# EAGLE board CT_schematic (EAGLE 7.6.0)

Size 100 x 80 mm. Coordinates in mm from the lower left corner, seen from the top.
Outline: 0,0 100,0 100,80 0,80 0,0
Copper layers (1*16): Top 0.035mm / dielectric 1.5mm / Bottom 0.035mm
Design rules "default": minimum track width 10mil, minimum drill 24mil, track to track 8mil, track to pad 8mil, pad to pad 8mil, via to via 8mil, smd to smd 8mil, copper to edge 40mil, drill to drill 8mil, minimum pad ring 10mil, minimum via ring 8mil, stop-mask expansion 4mil, vias tented up to drill 0mil, thermal gap 10mil

## Footprints (pad centres in the part's own frame; a part is rotated, then mirrored left to right if it is on the bottom)
C0603 = smd 0.8 x 0.8: 1 -0.762,0; 2 0.762,0
C0402 = smd 0.5 x 0.5: 1 -0.508,0; 2 0.508,0
EXV-9B = smd 2.718 x 1.778: 1 -2.108,0; 2 2.108,0
EXV-9H = smd 3.505 x 1.676: 1 -2.857,0; 2 2.857,0
L0603 = smd 0.8 x 0.8: 1 -0.762,0; 2 0.762,0
PJ-037B_PACKAGE = drill 3.7 square: 1 12,0 | drill 3.2 square: 2 6,0
R0603 = smd 0.8 x 0.8: 1 -0.762,0; 2 0.762,0
WLCSP64 = smd 0.34 x 0.34: A1 -1.75,1.75; A2 -1.25,1.75; A3 -0.75,1.75; A4 -0.25,1.75; A5 0.25,1.75; A6 0.75,1.75; A7 1.25,1.75; A8 1.75,1.75; B1 -1.75,1.25; B2 -1.25,1.25; B3 -0.75,1.25; B4 -0.25,1.25; B5 0.25,1.25; B6 0.75,1.25; B7 1.25,1.25; B8 1.75,1.25; C1 -1.75,0.75; C2 -1.25,0.75; C3 -0.75,0.75; C4 -0.25,0.75; C5 0.25,0.75; C6 0.75,0.75; C7 1.25,0.75; C8 1.75,0.75; D1 -1.75,0.25; D2 -1.25,0.25; D3 -0.75,0.25; D4 -0.25,0.25; D5 0.25,0.25; D6 0.75,0.25; D7 1.25,0.25; D8 1.75,0.25; E1 -1.75,-0.25; E2 -1.25,-0.25; E3 -0.75,-0.25; E4 -0.25,-0.25; E5 0.25,-0.25; E6 0.75,-0.25; E7 1.25,-0.25; E8 1.75,-0.25; F1 -1.75,-0.75; F2 -1.25,-0.75; F3 -0.75,-0.75; F4 -0.25,-0.75; F5 0.25,-0.75; F6 0.75,-0.75; F7 1.25,-0.75; F8 1.75,-0.75; G1 -1.75,-1.25; G2 -1.25,-1.25; G3 -0.75,-1.25; G4 -0.25,-1.25; G5 0.25,-1.25; G6 0.75,-1.25; G7 1.25,-1.25; G8 1.75,-1.25; H1 -1.75,-1.75; H2 -1.25,-1.75; H3 -0.75,-1.75; H4 -0.25,-1.75; H5 0.25,-1.75; H6 0.75,-1.75; H7 1.25,-1.75; H8 1.75,-1.75
TST-110-05-T-D-RA = drill 1 pad 1.7 square: 1 0,0 | drill 1 pad 1.7: 2 0,2.54; 3 2.54,0; 4 2.54,2.54; 5 5.08,0; 6 5.08,2.54; 7 7.62,0; 8 7.62,2.54; 9 10.16,0; 10 10.16,2.54; 11 12.7,0; 12 12.7,2.54; 13 15.24,0; 14 15.24,2.54; 15 17.78,0; 16 17.78,2.54; 17 20.32,0; 18 20.32,2.54; 19 22.86,0; 20 22.86,2.54
TDFN-8/6MM = smd 0.3 x 0.75: 1 0,0; 2 0.5,0; 3 1,0; 4 1.5,0; 5 1.5,3; 6 1,3; 7 0.5,3; 8 0,3
USB-A-H = drill 0.914: 1 2.718,3.493; 2 2.718,1.003; 3 2.718,-1.003; 4 2.718,-3.493 | drill 2.311: 5 0,-6.566; 6 0,6.566
SOT143B = smd 1 x 0.7: 1 -0.75,-1 | smd 0.6 x 0.7: 2 0.95,-1; 3 0.95,1; 4 -0.95,1
ABLS-25.000MHZ-B2F-T = smd 5.6 x 2.8: 1 -3.81,0; 2 5.69,0
ASEK = smd 1.4 x 1: 1 -1.1,-0.8; 2 1.1,-0.8; 3 1.1,0.8; 4 -1.1,0.8
LP2954 = smd 1.6 x 0.6: 1 -2.475,1.905 | smd 1.55 x 0.6: 2 -2.475,0.635; 3 -2.475,-0.635; 4 -2.475,-1.905; 5 2.475,-1.905; 6 2.475,-0.635; 7 2.475,0.635; 8 2.475,1.905
SON-6 = smd 0.55 x 0.3: 1 -0.355,0.5 | smd 0.52 x 0.3: 2 -0.37,0; 3 -0.37,-0.5; 4 0.37,-0.5; 5 0.37,0; 6 0.37,0.5
SW_4-1437565-2 = smd 1.4 x 2.1: 1 -2.23,4.55; 2 -2.23,-4.55; 3 2.23,4.55; 4 2.23,-4.55
LGM67K-G1J2-24-Z = smd 0.8 x 1.4: A -2,0; C 0,0
NC7SZ125M5X = smd 1.3 x 0.7: 1 -1.3,0.95; 2 -1.3,0; 3 -1.3,-0.95; 4 1.3,-0.95; 5 1.3,0.95

## Placement (x,y rotation side)
C1  1e-07  [C0603]  -33.02,59.69 0 top  (outside the outline)
C2  1e-07  [C0603]  -36.83,59.69 0 top  (outside the outline)
C3  1e-07  [C0603]  -40.64,59.69 0 top  (outside the outline)
C4  1e-07  [C0603]  -44.45,59.69 0 top  (outside the outline)
C5  4.7e-06  [C0603]  -29.21,59.69 0 top  (outside the outline)
C6  1e-07  [C0603]  -48.26,59.69 0 top  (outside the outline)
C7  1e-08  [C0603]  -52.07,59.69 0 top  (outside the outline)
C8  1e-06  [C0603]  -55.88,59.69 0 top  (outside the outline)
C9  1e-11  [C0402]  -30.48,64.77 0 top  (outside the outline)
C10  1e-11  [C0402]  -34.29,64.77 0 top  (outside the outline)
C11  1e-07  [C0402]  -38.1,64.77 0 top  (outside the outline)
C12  1e-08  [C0402]  -41.91,64.77 0 top  (outside the outline)
C13  1e-08  [C0402]  -45.72,64.77 0 top  (outside the outline)
C14  1e-06  [EXV-9B]  -50.8,45.72 0 top  (outside the outline)
C15  2.2e-06  [EXV-9B]  -59.69,45.72 0 top  (outside the outline)
C16  1e-07  [C0402]  -49.53,64.77 0 top  (outside the outline)
C17  0.0001  [EXV-9H]  -38.1,39.37 0 top  (outside the outline)
C18  0.0001  [EXV-9H]  -49.53,39.37 0 top  (outside the outline)
C19  1e-08  [C0402]  -53.34,64.77 0 top  (outside the outline)
C20  1e-08  [C0402]  -57.15,64.77 0 top  (outside the outline)
F1  240.0  [L0603]  -59.69,59.69 0 top  (outside the outline)
J1  PJ-037B  [PJ-037B_PACKAGE]  -44.45,7.62 0 top  (outside the outline)
R2  1000.0  [R0603]  -63.5,59.69 0 top  (outside the outline)
R4  4700.0  [R0603]  -15.24,64.77 0 top  (outside the outline)
R5  2200.0  [R0603]  -19.05,64.77 0 top  (outside the outline)
R6  2200.0  [R0603]  -22.86,64.77 0 top  (outside the outline)
R7  10000.0  [R0603]  -59.69,53.34 0 top  (outside the outline)
R8  10000.0  [R0603]  -15.24,59.69 0 top  (outside the outline)
R9  100000.0  [R0603]  -34.29,53.34 0 top  (outside the outline)
R10  100000.0  [R0603]  -39.37,53.34 0 top  (outside the outline)
R11  164658.62  [R0603]  -29.21,53.34 0 top  (outside the outline)
R12  100000.0  [R0603]  -44.45,53.34 0 top  (outside the outline)
R13  10000.0  [R0603]  -20.32,59.69 0 top  (outside the outline)
R14  10000.0  [R0603]  -25.4,59.69 0 top  (outside the outline)
R15  9100.0  [R0603]  -26.67,64.77 0 top  (outside the outline)
R16  680000.0  [R0603]  -49.53,53.34 0 top  (outside the outline)
R17  120000.0  [R0603]  -54.61,53.34 0 top  (outside the outline)
U1  STM32L152RDY6  [WLCSP64]  -55.88,21.59 0 top  (outside the outline)
U2  TST-110-05-T-D-RA  [TST-110-05-T-D-RA]  -46.99,29.21 0 top  (outside the outline)
U3  24AA00T-I/MNY  [TDFN-8/6MM]  -24.13,21.59 0 top  (outside the outline)
U4  61400416021  [USB-A-H]  -19.05,8.89 0 top  (outside the outline)
U5  prtr5v0u2ax  [SOT143B]  -24.13,69.85 0 top  (outside the outline)
U6  ABLS-25.000MHZ-B2F-T  [ABLS-25.000MHZ-B2F-T]  -26.67,46.99 0 top  (outside the outline)
U7  ASEK-32.768KHz-ECST  [ASEK]  -29.21,39.37 0 top  (outside the outline)
U8  LP2954AIMX/NOPB  [LP2954]  -39.37,22.86 0 top  (outside the outline)
U9  TPS3895ADRYR  [SON-6]  -27.94,68.58 0 top  (outside the outline)
U10  4-1437565-2  [SW_4-1437565-2]  -60.96,6.35 0 top  (outside the outline)
U11  Q65110A2395  [LGM67K-G1J2-24-Z]  -38.1,46.99 0 top  (outside the outline)
U12  nc7sz125m5x  [NC7SZ125M5X]  -15.24,53.34 0 top  (outside the outline)
U13  nc7sz125m5x  [NC7SZ125M5X]  -21.59,53.34 0 top  (outside the outline)

## Library data of the parts
C1-C20 F1 J1 R2 R4-R17 U1-U13 = circuit_tree

## Nets
CLK_CRYSTAL_U1_D7: C9.1 U1.D7 U6.1
CLK_CRYSTAL_U1_D8: C10.1 U1.D8 U6.2
CLK_U1_B8: U1.B8 U7.3
GND: C1.2 C2.2 C3.2 C4.2 C5.2 C6.2 C7.2 C8.2 C9.2 C10.2 C11.2 C12.2 C13.2 C14.2 C15.2 C16.2 C17.2 C18.2 C19.2 C20.2 J1.2 R2.2 R7.2 R12.2 R15.2 R17.2 U1.A7 U1.B1 U1.E7 U1.F5 U1.H2 U2.4 U2.6 U2.8 U2.10 U2.12 U2.14 U2.16 U2.18 U2.20 U3.4 U4.4 U4.5 U4.6 U5.1 U7.2 U8.4 U9.2 U11.C U12.2 U12.3 U13.1 U13.3
NET_U1_A6: R7.1 U1.A6
NET_U1_B5: R5.1 U1.B5 U3.6
NET_U1_B6: R6.1 U1.B6 U3.5
NET_U1_C6: C6.1 U1.C6
NET_U1_C7: R4.1 U1.C7 U13.4
NET_U1_G8: C7.1 C8.1 F1.1 U1.G8
NET_U1_H7: U11.A
NET_U1_H8: U10.3 U10.4
NET_U5_4: U4.1 U5.4
NET_U8_3: R10.1 U8.3
NET_U8_5: R9.1 U8.5
NET_U8_7: R11.2 R12.1 U8.7
NET_U9_1: R14.1 R15.1 U9.1
NET_U9_3: R16.2 R17.1 U9.3
NET_U9_4: R13.1 U9.4 U12.4 U13.2
NET_U10_1: R2.1 U10.1 U10.2
PROC_SYS_JTCK_SWCLK: U1.B2 U2.9
PROC_SYS_JTDO_TRACESWO: U1.A4 U2.13
PROC_SYS_JTMS_SWDIO: U1.D4 U2.7
PROC_USB_DM: U1.C1 U4.2 U5.3
PROC_USB_DP: U1.C2 U4.3 U5.2
RST_OUT_U2_SRESET_B: R8.1 U2.15 U12.1
VCC_S1_8V3: C14.1 C17.1 C18.1 J1.1 R10.2 U8.8
VCC_TIER1_3V3: C1.1 C2.1 C3.1 C4.1 C5.1 C11.1 C12.1 C13.1 C15.1 C16.1 C19.1 C20.1 F1.2 R4.2 R5.2 R6.2 R8.2 R9.2 R11.1 R13.2 R14.2 R16.1 U1.A1 U1.A8 U1.G6 U1.H1 U2.1 U3.8 U7.4 U8.1 U9.6 U12.5 U13.5

## Tracks (layer width: path | path; a pad name or v marks a point on that pad's centre or on a via)
CLK_CRYSTAL_U1_D7  (2 unrouted)
CLK_CRYSTAL_U1_D8  (2 unrouted)
CLK_U1_B8  (1 unrouted)
GND  (52 unrouted)
NET_U1_A6  (1 unrouted)
NET_U1_B5  (2 unrouted)
NET_U1_B6  (2 unrouted)
NET_U1_C6  (1 unrouted)
NET_U1_C7  (2 unrouted)
NET_U1_G8  (3 unrouted)
NET_U1_H8  (1 unrouted)
NET_U5_4  (1 unrouted)
NET_U8_3  (1 unrouted)
NET_U8_5  (1 unrouted)
NET_U8_7  (2 unrouted)
NET_U9_1  (2 unrouted)
NET_U9_3  (2 unrouted)
NET_U9_4  (3 unrouted)
NET_U10_1  (2 unrouted)
PROC_SYS_JTCK_SWCLK  (1 unrouted)
PROC_SYS_JTDO_TRACESWO  (1 unrouted)
PROC_SYS_JTMS_SWDIO  (1 unrouted)
PROC_USB_DM  (2 unrouted)
PROC_USB_DP  (2 unrouted)
RST_OUT_U2_SRESET_B  (2 unrouted)
VCC_S1_8V3  (5 unrouted)
VCC_TIER1_3V3  (32 unrouted)